# Altium PCB Arduino_SLVN.PcbDoc
Units mm, origin at the board's own origin, x right, y up, seen from the top; angles counter-clockwise.
Board outline 70.5 x 44.25 mm, 2 copper layers (Top Layer, Bottom Layer); 74 components, 54 nets, 207 pads, 45 vias.
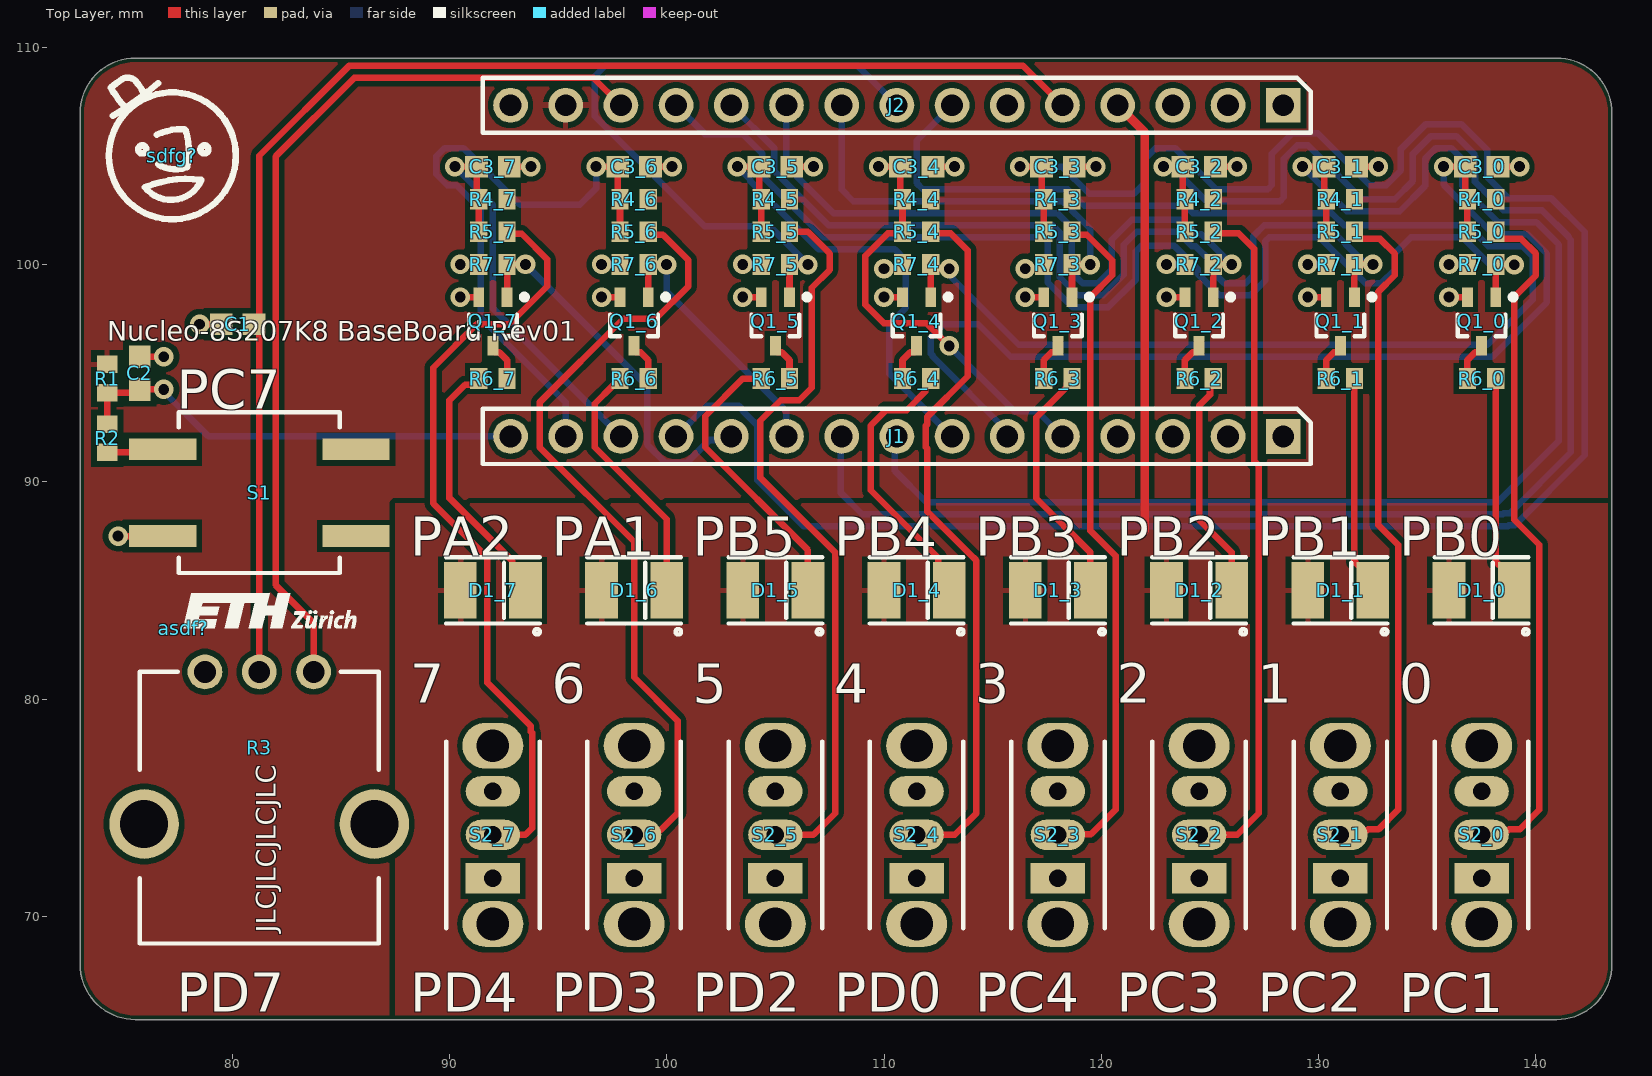
[diagram p0: Top Layer view]
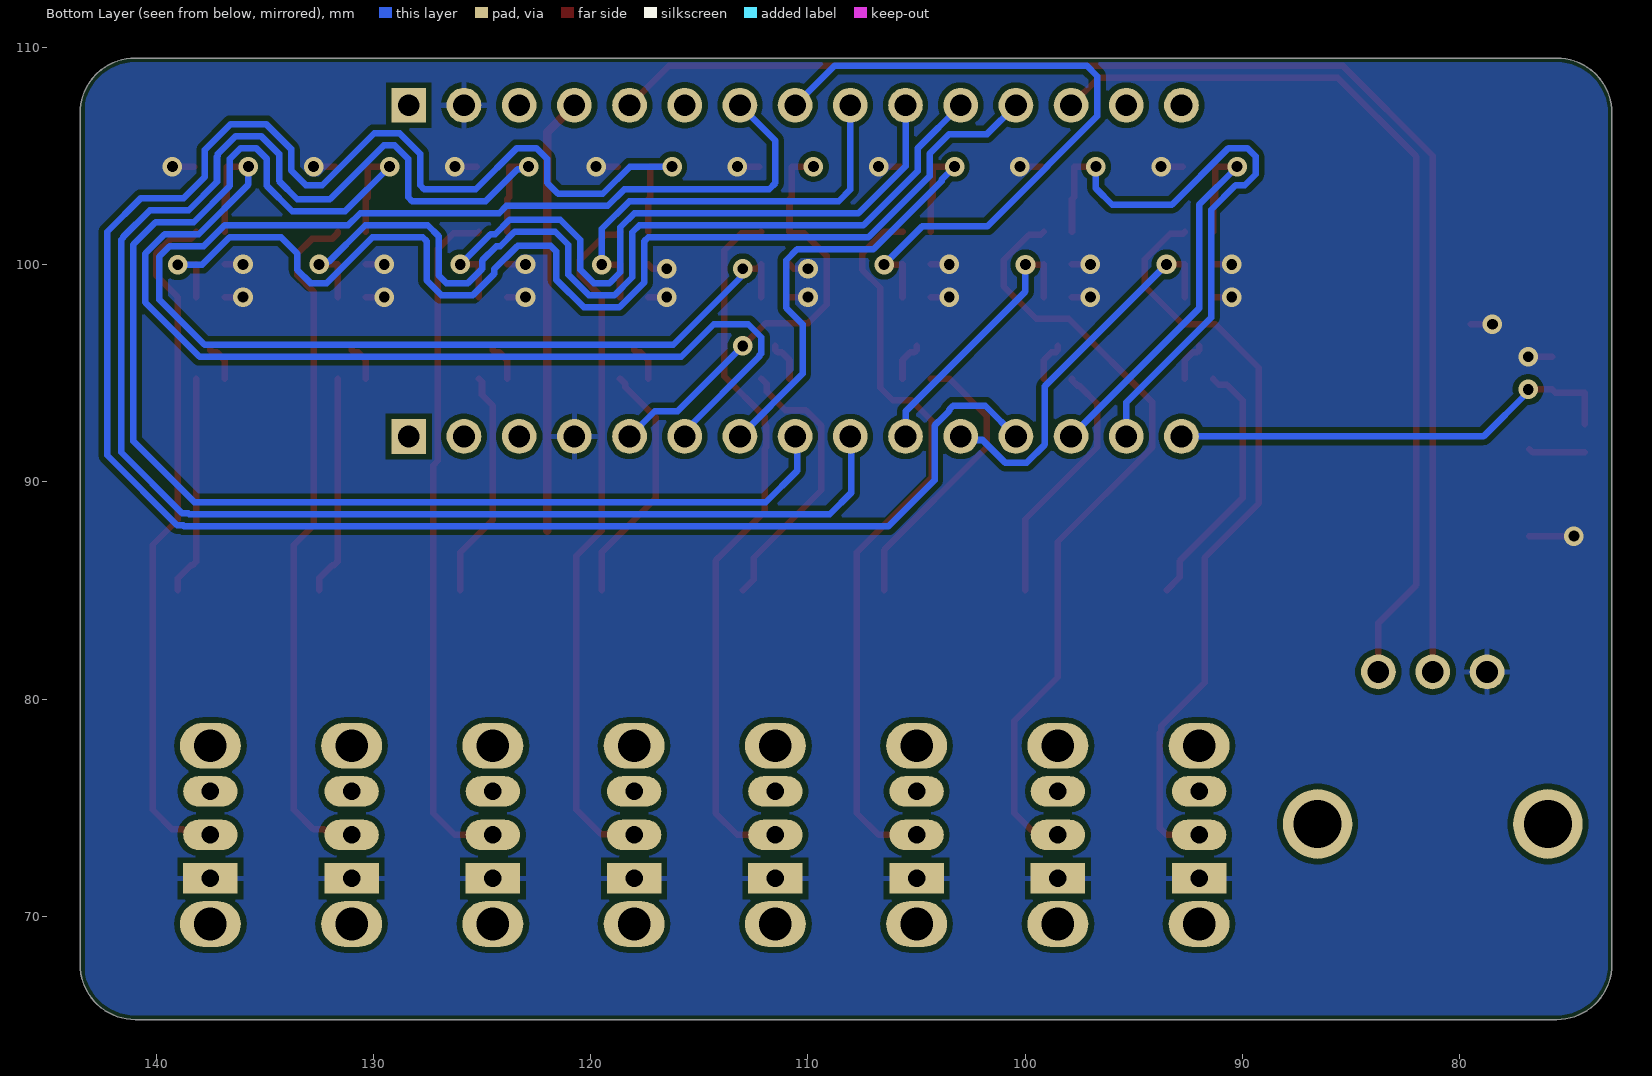
[diagram p1: Bottom Layer view, seen from below]
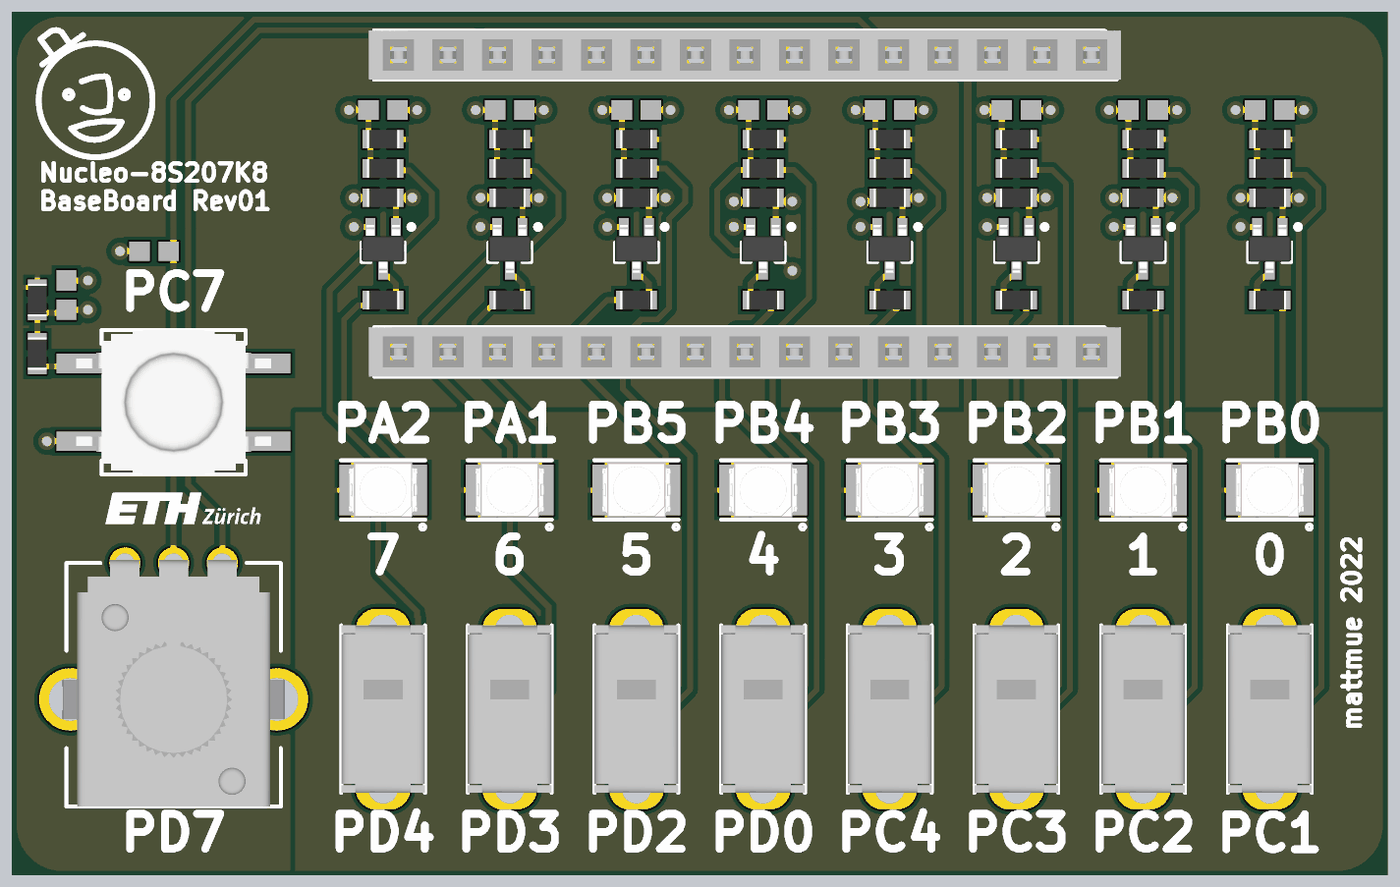
[diagram p2: 3D render of the assembled board from above, using the file's embedded part models]

## Layer stack, top to bottom
Top Solder: solder mask 0.0102, Solder Resist, Dk 3.5
Top Layer: signal copper 0.0356
Dielectric 1: dielectric 0.32, FR-4, Dk 4.8
Bottom Layer: signal copper 0.0356
Bottom Solder: solder mask 0.0102, Solder Resist, Dk 3.5

## Board outline
140.96,109.5 cw(c140.96,106.96) 143.5,106.96 143.5,67.79 cw(c140.96,67.79) 140.96,65.25 75.54,65.25 cw(c75.54,67.79) 73,67.79 73,106.96 cw(c75.54,106.96) 75.54,109.5

## Design rules (kind name [scope] priority, off if disabled: settings)
BoardOutlineClearance [All] p1: gap=0.2 ignorepadtopadclearanceinfootprint=FALSE
Clearance [All] p1: gap=0.254 ignorepadtopadclearanceinfootprint=FALSE except(0: Arc-Hole Track-Hole SMDPad-Hole THPad-Hole Via-Hole Fill-Hole Poly-Hole Region-Hole Text-Hole)
PolygonConnect [All] p1: thpad.connectstyle=Relief thpad.reliefconductorwidth=0.254 thpad.reliefentries=4 thpad.polygonreliefangle="90 Angle" thpad.airgapwidth=0.254 smdpad.connectstyle=Relief smdpad.reliefconductorwidth=0.254 smdpad.reliefentries=4 smdpad.polygonreliefangle="90 Angle" smdpad.airgapwidth=0.254 via.connectstyle=Direct via.reliefconductorwidth=0.254 via.reliefentries=4 via.polygonreliefangle="90 Angle" via.airgapwidth=0.254
RoomDefinition 0 [InComponentClass('0')] p1: confinementstyle=ConfineIn formatcopy=TRUE lockcomponents=FALSE outline 134.25,65.5 140.75,65.5 140.75,105.75 134.25,105.75
RoomDefinition STM8Nucleo_Baseboard [InComponentClass('STM8Nucleo_Baseboard')] p2: confinementstyle=ConfineIn formatcopy=TRUE lockcomponents=FALSE outline 81.675,8.25 110.25,8.25 110.25,19.426 81.675,19.426
RoomDefinition 7 [InComponentClass('7')] p3: confinementstyle=ConfineIn formatcopy=TRUE lockcomponents=FALSE outline 88.75,65.5 95.25,65.5 95.25,105.75 88.75,105.75
RoomDefinition 6 [InComponentClass('6')] p4: confinementstyle=ConfineIn formatcopy=TRUE lockcomponents=FALSE outline 95.25,65.5 101.75,65.5 101.75,105.75 95.25,105.75
RoomDefinition 5 [InComponentClass('5')] p5: confinementstyle=ConfineIn formatcopy=TRUE lockcomponents=FALSE outline 101.75,65.5 108.25,65.5 108.25,105.75 101.75,105.75
RoomDefinition 4 [InComponentClass('4')] p6: confinementstyle=ConfineIn formatcopy=TRUE lockcomponents=FALSE outline 108.25,65.5 114.75,65.5 114.75,105.75 108.25,105.75
RoomDefinition 3 [InComponentClass('3')] p7: confinementstyle=ConfineIn formatcopy=TRUE lockcomponents=FALSE outline 114.75,65.5 121.25,65.5 121.25,105.75 114.75,105.75
RoomDefinition 2 [InComponentClass('2')] p8: confinementstyle=ConfineIn formatcopy=TRUE lockcomponents=FALSE outline 121.25,65.5 127.75,65.5 127.75,105.75 121.25,105.75
RoomDefinition 1 [InComponentClass('1')] p9: confinementstyle=ConfineIn formatcopy=TRUE lockcomponents=FALSE outline 127.75,65.5 134.25,65.5 134.25,105.75 127.75,105.75
RoutingVias [All] p1: holewidth=0.5 width=0.9 viastyle="Through Hole" minholewidth=0.2 minwidth=0.4 maxholewidth=0.711 maxwidth=1.27
SolderMaskExpansion [All] p1: expansion=0.102 istentingtop=FALSE
Width [All] p1: maxlimit=1 minlimit=0.25 preferedwidth=0.3
30 further rules are at their usual default settings.

## Classes and differential pairs
channel class Switch_Led: 0 1 2 3 4 5 6 7
component class STM8Nucleo_Baseboard: asdf? C1 C2 J1 J2 R1 R2 R3 S1 sdfg?
component class 0: C3_0 D1_0 Q1_0 R4_0 R5_0 R6_0 R7_0 S2_0
component class 7: C3_7 D1_7 Q1_7 R4_7 R5_7 R6_7 R7_7 S2_7
component class 6: C3_6 D1_6 Q1_6 R4_6 R5_6 R6_6 R7_6 S2_6
component class 5: C3_5 D1_5 Q1_5 R4_5 R5_5 R6_5 R7_5 S2_5
component class 4: C3_4 D1_4 Q1_4 R4_4 R5_4 R6_4 R7_4 S2_4
component class 3: C3_3 D1_3 Q1_3 R4_3 R5_3 R6_3 R7_3 S2_3
component class 2: C3_2 D1_2 Q1_2 R4_2 R5_2 R6_2 R7_2 S2_2
component class 1: C3_1 D1_1 Q1_1 R4_1 R5_1 R6_1 R7_1 S2_1

## Components (designator, comment, footprint, x,y, rotation, side; value= is the part's Value field where it differs from the comment)
asdf? "ETH-Logo" GRAPH_ETH_LOGO_SMALL 77.75,83.25 r0 top
C1 "C0603" SMD_CAPC1608X08N 80.25,97.25 r0 top value=1n
C2 "C0603" SMD_CAPC1608X08N 75.75,95 r270 top value=1n
C3_0 "C0603" SMD_CAPC1608X08N 137.5,104.5 r180 top value=1n (schematic designator C3)
C3_1 "C0603" SMD_CAPC1608X08N 131,104.5 r180 top value=1n (schematic designator C3)
C3_2 "C0603" SMD_CAPC1608X08N 124.5,104.5 r180 top value=1n (schematic designator C3)
C3_3 "C0603" SMD_CAPC1608X08N 118,104.5 r180 top value=1n (schematic designator C3)
C3_4 "C0603" SMD_CAPC1608X08N 111.5,104.5 r180 top value=1n (schematic designator C3)
C3_5 "C0603" SMD_CAPC1608X08N 105,104.5 r180 top value=1n (schematic designator C3)
C3_6 "C0603" SMD_CAPC1608X08N 98.5,104.5 r180 top value=1n (schematic designator C3)
C3_7 "C0603" SMD_CAPC1608X08N 92,104.5 r180 top value=1n (schematic designator C3)
D1_0 "LST676" 2-PLCC 137.5,85 r90 top (schematic designator D1)
D1_1 "LST676" 2-PLCC 131,85 r90 top (schematic designator D1)
D1_2 "LST676" 2-PLCC 124.5,85 r90 top (schematic designator D1)
D1_3 "LST676" 2-PLCC 118,85 r90 top (schematic designator D1)
D1_4 "LST676" 2-PLCC 111.5,85 r90 top (schematic designator D1)
D1_5 "LST676" 2-PLCC 105,85 r90 top (schematic designator D1)
D1_6 "LST676" 2-PLCC 98.5,85 r90 top (schematic designator D1)
D1_7 "LST676" 2-PLCC 92,85 r90 top (schematic designator D1)
J1 "HEADER_FEMALE" THT_CONN_1x15_FEMALE_2.54 128.371,92.086 r270 top
J2 "HEADER_FEMALE" THT_CONN_1x15_FEMALE_2.54 128.371,107.326 r270 top
Q1_0 "BSS138" "SOT323 SC70" 137.5,97.375 r270 top (schematic designator Q1)
Q1_1 "BSS138" "SOT323 SC70" 131,97.375 r270 top (schematic designator Q1)
Q1_2 "BSS138" "SOT323 SC70" 124.5,97.375 r270 top (schematic designator Q1)
Q1_3 "BSS138" "SOT323 SC70" 118,97.375 r270 top (schematic designator Q1)
Q1_4 "BSS138" "SOT323 SC70" 111.5,97.375 r270 top (schematic designator Q1)
Q1_5 "BSS138" "SOT323 SC70" 105,97.375 r270 top (schematic designator Q1)
Q1_6 "BSS138" "SOT323 SC70" 98.5,97.375 r270 top (schematic designator Q1)
Q1_7 "BSS138" "SOT323 SC70" 92,97.375 r270 top (schematic designator Q1)
R1 "R0603" SMD_RESC1608X05N 74.25,94.75 r90 top value=10K
R2 "R0603" SMD_RESC1608X05N 74.25,92 r270 top value=150R
R3 "PTV09A-4020S-B103" THT_PTV09A-1 81.25,74.25 r180 top value=10K
R4_0 "R0603" SMD_RESC1608X05N 137.5,103 r0 top value=10K (schematic designator R4)
R4_1 "R0603" SMD_RESC1608X05N 131,103 r0 top value=10K (schematic designator R4)
R4_2 "R0603" SMD_RESC1608X05N 124.5,103 r0 top value=10K (schematic designator R4)
R4_3 "R0603" SMD_RESC1608X05N 118,103 r0 top value=10K (schematic designator R4)
R4_4 "R0603" SMD_RESC1608X05N 111.5,103 r0 top value=10K (schematic designator R4)
R4_5 "R0603" SMD_RESC1608X05N 105,103 r0 top value=10K (schematic designator R4)
R4_6 "R0603" SMD_RESC1608X05N 98.5,103 r0 top value=10K (schematic designator R4)
R4_7 "R0603" SMD_RESC1608X05N 92,103 r0 top value=10K (schematic designator R4)
R5_0 "R0603" SMD_RESC1608X05N 137.5,101.5 r0 top value=150R (schematic designator R5)
R5_1 "R0603" SMD_RESC1608X05N 131,101.5 r0 top value=150R (schematic designator R5)
R5_2 "R0603" SMD_RESC1608X05N 124.5,101.5 r0 top value=150R (schematic designator R5)
R5_3 "R0603" SMD_RESC1608X05N 118,101.5 r0 top value=150R (schematic designator R5)
R5_4 "R0603" SMD_RESC1608X05N 111.5,101.5 r0 top value=150R (schematic designator R5)
R5_5 "R0603" SMD_RESC1608X05N 105,101.5 r0 top value=150R (schematic designator R5)
R5_6 "R0603" SMD_RESC1608X05N 98.5,101.5 r0 top value=150R (schematic designator R5)
R5_7 "R0603" SMD_RESC1608X05N 92,101.5 r0 top value=150R (schematic designator R5)
R6_0 "R0603" SMD_RESC1608X05N 137.5,94.75 r0 top value=150R (schematic designator R6)
R6_1 "R0603" SMD_RESC1608X05N 131,94.75 r0 top value=150R (schematic designator R6)
R6_2 "R0603" SMD_RESC1608X05N 124.5,94.75 r0 top value=150R (schematic designator R6)
R6_3 "R0603" SMD_RESC1608X05N 118,94.75 r0 top value=150R (schematic designator R6)
R6_4 "R0603" SMD_RESC1608X05N 111.5,94.75 r0 top value=150R (schematic designator R6)
R6_5 "R0603" SMD_RESC1608X05N 105,94.75 r180 top value=150R (schematic designator R6)
R6_6 "R0603" SMD_RESC1608X05N 98.5,94.75 r180 top value=150R (schematic designator R6)
R6_7 "R0603" SMD_RESC1608X05N 92,94.75 r180 top value=150R (schematic designator R6)
R7_0 "R0603" SMD_RESC1608X05N 137.5,100 r0 top value=10K (schematic designator R7)
R7_1 "R0603" SMD_RESC1608X05N 131,100 r0 top value=10K (schematic designator R7)
R7_2 "R0603" SMD_RESC1608X05N 124.5,100 r0 top value=10K (schematic designator R7)
R7_3 "R0603" SMD_RESC1608X05N 118,100 r0 top value=10K (schematic designator R7)
R7_4 "R0603" SMD_RESC1608X05N 111.5,100 r0 top value=10K (schematic designator R7)
R7_5 "R0603" SMD_RESC1608X05N 105,100 r0 top value=10K (schematic designator R7)
R7_6 "R0603" SMD_RESC1608X05N 98.5,100 r0 top value=10K (schematic designator R7)
R7_7 "R0603" SMD_RESC1608X05N 92,100 r0 top value=10K (schematic designator R7)
S1 "TL6120" SMD_TL6120 81.25,89.5 r0 top
S2_0 "OS102011MS2QN1" THT_SLIDESWITCH_86X43 137.5,73.75 r90 top (schematic designator S2)
S2_1 "OS102011MS2QN1" THT_SLIDESWITCH_86X43 131,73.75 r90 top (schematic designator S2)
S2_2 "OS102011MS2QN1" THT_SLIDESWITCH_86X43 124.5,73.75 r90 top (schematic designator S2)
S2_3 "OS102011MS2QN1" THT_SLIDESWITCH_86X43 118,73.75 r90 top (schematic designator S2)
S2_4 "OS102011MS2QN1" THT_SLIDESWITCH_86X43 111.5,73.75 r90 top (schematic designator S2)
S2_5 "OS102011MS2QN1" THT_SLIDESWITCH_86X43 105,73.75 r90 top (schematic designator S2)
S2_6 "OS102011MS2QN1" THT_SLIDESWITCH_86X43 98.5,73.75 r90 top (schematic designator S2)
S2_7 "OS102011MS2QN1" THT_SLIDESWITCH_86X43 92,73.75 r90 top (schematic designator S2)
sdfg? "Mattmue-Logo" GRAPH_MATTMUE_6MM 77.25,105 r0 top

## Footprints (in the part's own frame and the unit in brackets; to place one, negate y for a bottom-side part, rotate by r counter-clockwise, add the part's x,y. Pads: shape width x height; smd on the part's side, far side on the other; paste and mask are expansions set on the pad)
2-PLCC [mm] "2-PLCC, SMD, 3x5x2.1"
  rect 2.6x1.5 smd: 1(0,1.5) 2(0,-1.5)
  silkscreen extent -2.03,-2.16 1.52,2.16, body extent -1.4,-1.75 1.4,1.75, height 1.65
GRAPH_ETH_LOGO_SMALL [mm] "Small Logo of ETH"
  silkscreen extent 0,0 7.97,1.62
GRAPH_MATTMUE_6MM [mm] "Logo of mattmue"
  silkscreen extent -2.92,-2.92 2.92,3.6
SMD_CAPC1608X08N [mm] "Chip Capacitor, 2-Leads, Body 1.60x0.80mm, 0603, IPC Medium Density"
  rect 1.05x1 smd: 1(-0.75,0) 2(0.75,0)
  body extent -0.88,-0.48 0.87,0.47, height 0.85
SMD_RESC1608X05N [mm] "Chip Resistor, 2-Leads, Body 1.58x0.85mm, 0603, IPC Medium Density"
  rect 0.8x0.95 smd: 1(-0.65,0) 2(0.65,0)
  body extent -0.82,-0.48 0.82,0.48, height 0.5
SMD_TL6120 [mm] "Pushbutton, 4P, 7.4x7.4x6.9mm"
  rect 3.1x1 smd: 1(-4.45,-2) 2(-4.45,2) 3(4.45,2) 4(4.45,-2)
  silkscreen extent -3.7,-3.7 3.7,3.7, body extent -5,-3.7 5,3.7, height 6.95
"SOT323 SC70" [mm] "SOT323 SC70, 3-Leads, Body 2.00x2.23mm, Pitch 0.65mm, IPC Medium Density"
  rect 0.9x0.5 smd: 1(-1.125,0.65) 2(-1.125,-0.65) 3(1.125,0)
  silkscreen extent -1.25,-1.1 0.67,1.58, body extent -1.22,-1.1 1.22,1.1, height 1.1
THT_CONN_1x15_FEMALE_2.54 [mm] "Connector, THT, Female Header, 2x15 poles, 2.54mm pitch"
  rect 1.6x1.6 hole 1: 1(0,0)
  round 1.6 hole 1: 2(0,-2.54) 3(0,-5.08) 4(0,-7.62) 5(0,-10.16) 6(0,-12.7) 7(0,-15.24) 8(0,-17.78) 9(0,-20.32) 10(0,-22.86) 11(0,-25.4) 12(0,-27.94) 13(0,-30.48) 14(0,-33.02) 15(0,-35.56)
  silkscreen extent -1.27,-36.83 1.27,1.27, body extent -1.27,-37.1 1.27,1.5, height 8.5
THT_PTV09A-1 [mm] "THT, Potentiometer, 3 Leads Straight, 9.7x11x25mm"
  round 1.6 hole 1: 1(-2.5,-7) 2(2.5,-7) 3(0,-7)
  round 3.2 hole 2.2: NC1(-5.3,0) NC2(5.3,0)
  silkscreen extent -5.5,-7 5.5,5.5, body extent -5.7,-7.15 5.7,5.5, height 20
THT_SLIDESWITCH_86X43 [mm] "Slideswitch OS, THT, Straight, 8.6x4.3x8.7"
  rect 1.4x2.5 hole 0.8: 1(-2,0)
  oval 1.4x2.5 hole 0.8: 2(0,0) 3(2,0)
  oval 2.1x2.8 hole 1.5: NC1(-4.1,0) NC2(4.1,0)
  silkscreen extent -4.3,-2.15 4.3,2.15, body extent -4.3,-2.15 4.3,2.15, height 8.7

## Part data
asdf?: library part CMPL-001-0407-A.3, "GRAPH ETH"
C1 C2 C3_0 C3_1 C3_2 C3_3 C3_4 C3_5 C3_6 C3_7: library part CMP-02314-1, "CERCAP 1n 100V 1% NP0/C0G 0603", MANUFACTURER=KEMET, Manufacturer Part Number=C0603C102F1GAC7867, Supplier Part Number=399-17967-1-ND, Supplier=Digi-Key
D1_0 D1_1 D1_2 D1_3 D1_4 D1_5 D1_6 D1_7: library part CMP-01594-1, "LED RED 30mA 2V 3x3.4mm", MANUFACTURER="OSRAM Opto Semiconductors Inc.", Manufacturer Part Number="LS T676-R1S1-1-Z", Supplier Part Number=475-2683-1-ND, Supplier=Digi-Key
J1 J2: library part CMP-01593-2, "CONN Female 1x15 2.54mm Straight THT 2.54x38.6mm", MANUFACTURER="Sullins Connector Solutions", Manufacturer Part Number=PPPC151LFBN-RC, Supplier Part Number=S7048-ND, Supplier=Digi-Key
Q1_0 Q1_1 Q1_2 Q1_3 Q1_4 Q1_5 Q1_6 Q1_7: library part CMP-01592-1, "MOSFET N 0.2A 50V SOT323", MANUFACTURER="Diodes Incorporated", Manufacturer2="Micro Commercial Co", Manufacturer2 Part Number=BSS138W-TP, Manufacturer Part Number=BSS138W-7-F, Supplier2 Part Number=BSS138W-TPMSCT-ND, Supplier Part Number=BSS138W-FDICT-ND, Supplier=Digi-Key, Supplier2=Digi-Key
R1 R4_0 R4_1 R4_2 R4_3 R4_4 R4_5 R4_6 R4_7 R7_0 R7_1 R7_2 R7_3 R7_4 R7_5 R7_6 R7_7: library part CMPL-001-0158-A.2, "RES 10K 100mW 1% 0603", MANUFACTURER=YAEGO, Manufacturer2="Vishay Dale", Manufacturer2 Part Number=CRCW060310K0FKEA, Manufacturer Part Number=RC0603FR-0710KL, Supplier2 Part Number=541-10.0KHCT-ND, Supplier Part Number=311-10.0KHRCT-ND, Supplier=Digi-Key, Supplier2=Digi-Key
R2 R5_0 R5_1 R5_2 R5_3 R5_4 R5_5 R5_6 R5_7 R6_0 R6_1 R6_2 R6_3 R6_4 R6_5 R6_6 R6_7: library part CMPL-001-0114-A.2, "RES 150R 100mW 1% 0603", MANUFACTURER=YAEGO, Manufacturer2="Vishay Dale", Manufacturer2 Part Number=CRCW0603150RFKEA, Manufacturer Part Number=RC0603FR-07150RL, Supplier2 Part Number=541-150HCT-ND, Supplier Part Number=311-150HRCT-ND, Supplier=Digi-Key, Supplier2=Digi-Key
R3: library part CMPL-001-0007-A.2, "POTENTIOMETER 10K 50mW 20% 11x9.7mm", MANUFACTURER="Bourns Inc.", Supplier Part Number=PTV09A-4020S-B103-ND, Manufacturer Part Number=PTV09A-4020S-B103, Note=Straight, Supplier=Digi-Key
S1: library part CMP-01596-1, "BUTTON SPST 12V 0.05A 7.4x7.4mm", MANUFACTURER=E-Switch, Manufacturer Part Number=TL6120CF300QG, Supplier Part Number=EG4355CT-ND, Supplier=Digi-Key
S2_0 S2_1 S2_2 S2_3 S2_4 S2_5 S2_6 S2_7: library part CMPL-001-0005-2, "SWITCH SPDT 12V 0.1A 4.3x8.6mm", MANUFACTURER=C&K, Supplier Part Number=CKN9565-ND, Manufacturer Part Number=OS102011MS2QN1, Supplier=Digi-Key
sdfg?: library part CMPL-001-0415-A.3, "GRAPH MATTMUE"

## Via types
v1: diameter 0.9, hole 0.5, Top Layer to Bottom Layer, tented both sides, 45 vias

## Nets (pads, with @x,y where several pads share a name; then routed paths per layer and width w, separated by ;. In a path a pad name is that pad's centre, name@x,y a point inside that pad or via, vN(x,y) a via of type N, cw(c..) or ccw(c..) an arc to the next point about the centre after c; other vN are vias at no path point)
3V3: J2.14 R1.2 R4_0.2 R4_1.2 R4_2.2 R4_3.2 R4_4.2 R4_5.2 R4_6.2 R4_7.2
5V: D1_0.1 D1_1.1 D1_2.1 D1_3.1 D1_4.1 D1_5.1 D1_6.1 D1_7.1 J2.4 | length 20.1
  Top Layer w0.4: J2.4 122,106.078 122,87.75
AREF: J2.13 R3.1 | length 42.4
  Top Layer w0.3: R3.1 83.75,83.5 82,85.25 82,104.967 85.629,108.596 96.622,108.596 J2.13
GND: C1.1 C2.1 C3_0.1 C3_1.1 C3_2.1 C3_3.1 C3_4.1 C3_5.1 C3_6.1 C3_7.1 J1.4 J2.2 Q1_0.2 Q1_1.2 Q1_2.2 Q1_3.2 Q1_4.2 Q1_5.2 Q1_6.2 Q1_7.2 R3.2 R7_0.1 R7_1.1 R7_2.1 R7_3.1 R7_4.1 R7_5.1 R7_6.1 R7_7.1 S1.1 S2_0.1 S2_1.1 S2_2.1 S2_3.1 S2_4.1 S2_5.1 S2_6.1 S2_7.1 | length 25.9
  Top Layer w0.3: v1(74.75,87.5) S1.1 ; C2.1 v1(76.854,95.75) ; v1(78.5,97.25) C1.1 ; v1(90.5,98.5) Q1_7.2 ; v1(90.5,100) R7_7.1 ; C3_7.1 v1(93.75,104.5) ; v1(97,98.5) Q1_6.2 ; v1(97,100) R7_6.1 ; C3_6.1 v1(100.25,104.5) ; v1(103.5,98.5) Q1_5.2 ; v1(103.5,100) R7_5.1 ; C3_5.1 v1(106.75,104.5) ; v1(110,98.5) Q1_4.2 ; v1(110,99.802) 110.652,99.802 R7_4.1 ; C3_4.1 v1(113.25,104.5) ; v1(116.5,98.5) Q1_3.2 ; v1(116.5,99.802) 117.152,99.802 R7_3.1 ; C3_3.1 v1(119.75,104.5) ; v1(123,98.5) Q1_2.2 ; v1(123,100) R7_2.1 ; C3_2.1 v1(126.25,104.5) ; v1(129.5,98.5) Q1_1.2 ; v1(129.5,100) R7_1.1 ; C3_1.1 v1(132.75,104.5) ; v1(136,98.5) Q1_0.2 ; v1(136,100) R7_0.1 ; C3_0.1 v1(139.25,104.5)
NetD1_0_2: D1_0.2 R6_0.2 | length 10.1
  Top Layer w0.3: R6_0.2 138.15,86.326 138.326,86.15 138.4,86.15 139,85.55 D1_0.2
NetD1_1_2: D1_1.2 R6_1.2 | length 10.1
  Top Layer w0.3: R6_1.2 131.65,86.326 131.826,86.15 131.9,86.15 132.5,85.55 D1_1.2
NetD1_2_2: D1_2.2 R6_2.2 | length 10.6
  Top Layer w0.3: R6_2.2 125.001,94.601 125.001,94.001 124.5,93.5 124.5,88.25 126,86.75 D1_2.2
NetD1_3_2: D1_3.2 R6_3.2 | length 11.5
  Top Layer w0.3: R6_3.2 118.4,94.5 118.4,94.354 117.007,92.961 117.007,89.243 119.5,86.75 D1_3.2
NetD1_4_2: D1_4.2 R6_4.2 | length 12.9
  Top Layer w0.3: R6_4.2 111.9,94.5 111.9,94.15 111.04,93.29 110.093,93.29 109.387,92.585 109.387,89.613 112.5,86.5 112.5,85.5 D1_4.2
NetD1_5_2: D1_5.2 R6_5.2 | length 13.3
  Top Layer w0.3: R6_5.2 103.5,94.75 101.767,93.017 101.767,91.588 106.5,86.855 D1_5.2
NetD1_6_2: D1_6.2 R6_6.2 | length 11.6
  Top Layer w0.3: R6_6.2 97.85,94.675 97.6,94.425 97.525,94.425 96.687,93.587 96.687,91.588 100,88.275 D1_6.2
NetD1_7_2: D1_7.2 R6_7.2 | length 12
  Top Layer w0.3: R6_7.2 91.35,94.719 91.1,94.469 90.719,94.469 90,93.75 90,89.25 92.9,86.35 92.9,85.6 D1_7.2
NetQ1_0_3: Q1_0.3 R6_0.1 | length 1.9
  Top Layer w0.3: R6_0.1 136.85,95.6 137.2,95.95 137.4,95.95 137.5,96.05 Q1_0.3
NetQ1_1_3: Q1_1.3 R6_1.1 | length 1.9
  Top Layer w0.3: R6_1.1 130.35,95.6 130.7,95.95 130.9,95.95 131,96.05 Q1_1.3
NetQ1_2_3: Q1_2.3 R6_2.1 | length 1.9
  Top Layer w0.3: R6_2.1 123.85,95.6 124.2,95.95 124.4,95.95 124.5,96.05 Q1_2.3
NetQ1_3_3: Q1_3.3 R6_3.1 | length 1.9
  Top Layer w0.3: R6_3.1 117.35,95.6 117.7,95.95 117.9,95.95 118,96.05 Q1_3.3
NetQ1_4_3: Q1_4.3 R6_4.1 | length 1.9
  Top Layer w0.3: R6_4.1 110.85,95.6 111.2,95.95 111.4,95.95 111.5,96.05 Q1_4.3
NetQ1_5_3: Q1_5.3 R6_5.1 | length 1.9
  Top Layer w0.3: Q1_5.3 105,96.05 105.1,95.95 105.3,95.95 105.65,95.6 R6_5.1
NetQ1_6_3: Q1_6.3 R6_6.1 | length 1.9
  Top Layer w0.3: Q1_6.3 98.5,96.05 98.6,95.95 98.8,95.95 99.15,95.6 R6_6.1
NetQ1_7_3: Q1_7.3 R6_7.1 | length 1.9
  Top Layer w0.3: Q1_7.3 92,96.05 92.1,95.95 92.3,95.95 92.65,95.6 R6_7.1
NetR2_2: R2.2 S1.2 | length 2.6
  Top Layer w0.3: R2.2 76.65,91.35 S1.2
NetR5_0_2: R5_0.2 S2_0.2 | length 31.9
  Top Layer w0.3: S2_0.2 137.71,73.96 138.736,73.96 138.776,74 139.25,74 140.154,74.904 140.154,87.096 139,88.25 139,98.5 140,99.5 140,100.5 139.325,101.175 138.4,101.175 138.15,101.425 R5_0.2
NetR5_1_2: R5_1.2 S2_1.2 | length 31.7
  Top Layer w0.3: S2_1.2 131.21,73.96 132.236,73.96 132.276,74 132.75,74 133.654,74.904 133.654,87.096 132.75,88 132.75,98.75 133.5,99.5 133.5,100.5 132.825,101.175 131.9,101.175 131.65,101.425 R5_1.2
NetR5_2_2: R5_2.2 S2_2.2 | length 31.4
  Top Layer w0.3: S2_2.2 126.25,73.75 127.25,74.75 127.25,90.75 127.035,90.965 127.035,100.715 126.325,101.425 125.225,101.425 R5_2.2
NetR5_3_2: R5_3.2 S2_3.2 | length 31.7
  Top Layer w0.3: S2_3.2 118.024,73.774 119.524,73.774 120.654,74.904 120.654,86.596 119.5,87.75 119.5,98.5 120.5,99.5 120.5,100.188 119.324,101.364 118.786,101.364 R5_3.2
NetR5_4_2: R5_4.2 S2_4.2 | length 32.9
  Top Layer w0.3: S2_4.2 113.25,73.75 114.25,74.75 114.25,86.371 113.917,86.704 112,88.621 112,91.515 111.927,91.588 111.927,92.585 112,92.658 112,93 113.854,94.854 113.854,100.646 113.075,101.425 112.225,101.425 R5_4.2
NetR5_5_2: R5_5.2 S2_5.2 | length 34.4
  Top Layer w0.3: S2_5.2 106.75,73.75 107.75,74.75 107.75,86.75 104.307,90.193 104.307,92.807 105.25,93.75 106.096,93.75 106.673,94.327 106.673,98.923 107.5,99.75 107.5,100.5 106.5,101.5 R5_5.2
NetR5_6_2: R5_6.2 S2_6.2 | length 36.6
  Top Layer w0.3: S2_6.2 98.71,73.96 99.71,73.96 100.5,74.75 100.5,79 98.5,81 98.5,87.235 94.147,91.588 94.147,93.647 98,97.5 99.5,97.5 101,99 101,100.188 99.824,101.364 99.286,101.364 R5_6.2
NetR5_7_2: R5_7.2 S2_7.2 | length 35.4
  Top Layer w0.3: S2_7.2 93.5,73.75 93.804,74.054 93.804,78.452 93.75,78.506 93.75,78.75 91.75,80.75 91.75,86.5 89.25,89 89.25,95.25 91.25,97.25 92.75,97.25 94.5,99 94.5,100.233 93.324,101.408 92.742,101.408 R5_7.2
PA1: J1.10 Q1_6.1 R7_6.2 | length 12.5
  Top Layer w0.3: Q1_6.1 R7_6.2 99.16,99.99 v1(99.99,99.99)
  Bottom Layer w0.3: v1(99.99,99.99) 99.99,98.76 105.511,93.239 J1.10
PA2: J1.11 Q1_7.1 R7_7.2 | length 17.7
  Top Layer w0.3: Q1_7.1 R7_7.2 v1(93.5,100)
  Bottom Layer w0.3: v1(93.5,100) 99.095,94.405 99.095,91.72 99.933,90.882 100.93,90.882 101.969,91.921 102.806,91.921 J1.11
PB0: J2.12 Q1_0.1 R7_0.2 | length 54.4
  Top Layer w0.3: Q1_0.1 R7_0.2 138.166,99.984 v1(139,99.984)
  Bottom Layer w0.3: J2.12 101.758,106 103.5,106 104.403,105.097 104.403,104.063 107.217,101.25 117.352,101.25 117.528,101.074 117.528,99.178 118.678,98.028 120.312,98.028 121.591,99.308 121.591,100.608 121.837,100.854 123.354,100.854 123.424,100.784 123.436,100.784 124.446,99.774 124.446,99.563 125.417,98.592 126.875,98.592 127.554,99.271 127.554,101.074 127.73,101.25 130.042,101.25 132.146,99.146 132.896,99.146 133.5,99.75 133.5,100.5 134.25,101.25 136.616,101.25 137.882,99.984 v1(139,99.984)
PB1: J2.11 Q1_1.1 R7_1.2 | length 43.4
  Top Layer w0.3: Q1_1.1 R7_1.2 v1(132.5,100)
  Bottom Layer w0.3: J2.11 104.957,105.34 104.957,104.293 107.446,101.804 117.758,101.804 118.082,101.479 118.082,99.407 118.907,98.582 120.082,98.582 121.037,99.537 121.037,100.908 121.63,101.5 122.5,101.5 122.501,101.501 123.502,101.501 124.164,100.84 124.338,100.84 125,100.178 125,99.792 125.646,99.146 126.646,99.146 127,99.5 127,101.083 127,101.304 127.5,101.804 130.379,101.804 132.068,100.115 132.385,100.115 v1(132.5,100)
PB2: J2.10 Q1_2.1 R7_2.2 | length 32
  Top Layer w0.3: Q1_2.1 R7_2.2 v1(126,100)
  Bottom Layer w0.3: J2.10 105.511,104.522 107.675,102.358 116.925,102.358 117.987,102.358 118.636,101.709 118.636,100.647 118.636,99.636 119.136,99.136 119.853,99.136 120.483,99.767 120.483,101.137 121.401,102.055 123.732,102.055 124.393,101.394 124.606,101.394 v1(126,100)
PB3: J2.9 Q1_3.1 R7_3.2 | length 20.1
  Top Layer w0.3: Q1_3.1 R7_3.2 118.66,99.99 v1(119.49,99.99)
  Bottom Layer w0.3: J2.9 108.051,103.449 108.588,102.912 118.217,102.912 119.49,101.638 v1(119.49,99.99)
PB4: J2.7 Q1_4.1 R7_4.2 | length 67.8
  Top Layer w0.3: Q1_4.1 R7_4.2 112.348,99.802 v1(113,99.802)
  Bottom Layer w0.3: v1(113,99.802) 113.115,99.687 113.115,99.385 116.196,96.304 137.771,96.304 139.854,98.387 139.854,100.363 139.379,100.838 137.812,100.838 136.846,101.804 131.163,101.804 130.609,102.358 124.213,102.358 123.875,102.696 119.216,102.696 118.446,103.466 111.784,103.466 111.5,103.75 111.5,105.695 J2.7
PB5: J2.8 Q1_5.1 R7_5.2 | length 31.7
  Top Layer w0.3: Q1_5.1 R7_5.2 105.654,99.996 v1(106.497,99.996)
  Bottom Layer w0.3: v1(106.497,99.996) 106.497,100.003 104.75,101.75 101.75,101.75 99,104.5 99,104.515 96.687,106.828 96.687,108.662 97.176,109.15 108.768,109.15 J2.8
PC1: C3_0.2 J1.6 R4_0.1 R5_0.1 | length 49.5
  Top Layer w0.3: v1(135.75,104.5) C3_0.2 136.75,103.1 R4_0.1 R5_0.1
  Bottom Layer w0.3: J1.6 115.671,92.329 112.25,95.75 112.25,95.792 112.146,95.896 112.146,96.646 112.75,97.25 114.333,97.25 115.833,95.75 138,95.75 140.5,98.25 140.5,100.5 139.608,101.392 138.041,101.392 135.75,103.683 v1(135.75,104.5)
PC2: C3_1.2 J1.8 R4_1.1 R5_1.1 | length 64.2
  Top Layer w0.3: v1(129.25,104.5) C3_1.2 130.25,103.1 R4_1.1 R5_1.1
  Bottom Layer w0.3: J1.8 110.5,91.995 110.5,90.5 111.946,89.054 138.237,89.054 141.054,91.871 141.054,100.913 140.021,101.946 138.271,101.946 136.604,103.613 136.604,104.854 136.104,105.354 135.396,105.354 134.896,104.854 134.896,104.646 134.896,103.613 133.729,102.446 132.696,102.446 131.304,102.446 v1(129.25,104.5)
PC3: C3_2.2 J1.9 R4_2.1 R5_2.1 | length 78.7
  Top Layer w0.3: v1(122.854,104.5) C3_2.2 123.75,103.1 R4_2.1 R5_2.1
  Bottom Layer w0.3: J1.9 108,92.035 108,89.5 109,88.5 138.467,88.5 138.521,88.554 138.804,88.554 141.608,91.358 141.608,101.142 141.5,101.25 141.5,101.283 140.283,102.5 138.5,102.5 137.196,103.804 137.196,104.966 137.158,105.004 137.158,105.083 136.333,105.908 135.167,105.908 134.342,105.083 134.342,103.842 133.5,103 132,103 129.516,105.484 129.026,105.484 128.396,104.854 128.396,103.088 128.22,102.912 124.838,102.912 123.365,104.385 122.969,104.385 v1(122.854,104.5)
PC4: C3_3.2 J1.12 R4_3.1 R5_3.1 | length 98.1
  Top Layer w0.3: v1(116.25,104.5) C3_3.2 117.25,103.1 R4_3.1 R5_3.1
  Bottom Layer w0.3: J1.12 101.845,93.5 103.324,93.5 103.5,93.324 103.5,93.26 103.755,93.005 104.175,92.585 104.175,90.075 106.304,87.946 138.696,87.946 138.75,88 139.033,88 142.25,91.217 142.25,101.5 140.696,103.054 138.729,103.054 137.75,104.033 137.75,105.275 136.563,106.462 134.937,106.462 133.788,105.313 133.788,104.33 133.104,103.646 132.354,103.646 129.962,106.038 128.797,106.038 127.842,105.083 127.842,103.642 127.666,103.466 125.284,103.466 123.396,105.354 122.5,105.354 122,104.854 122,103.75 121.5,103.25 119.446,103.25 118.196,104.5 v1(116.25,104.5)
PC5: J2.15
PC7: C2.2 J1.15 R1.1 R2.1 | length 21
  Top Layer w0.3: R2.1 R1.1 75.6,94.1 C2.2 v1(76.854,94.25)
  Bottom Layer w0.3: v1(76.854,94.25) 76.854,94.146 78.914,92.086 J1.15
PD0: C3_4.2 J1.5 R4_4.1 R5_4.1 | length 20.3
  Top Layer w0.3: v1(109.75,104.5) C3_4.2 110.75,103.1 R4_4.1 R5_4.1 110.776,101.426 110.176,101.426 109.146,100.396 109.146,98.146 109.996,97.296 111.954,97.296 v1(113,96.25)
  Bottom Layer w0.3: v1(113,96.25) 116,93.25 117.048,93.25 J1.5 J1.5@118.046,91.921
PD2: C3_5.2 J1.7 R4_5.1 R5_5.1 | length 23.2
  Top Layer w0.3: v1(103.25,104.5) C3_5.2 104.25,103.1 R4_5.1 R5_5.1
  Bottom Layer w0.3: v1(103.25,104.5) 103.849,103.901 103.849,103.834 106.987,100.696 110.5,100.696 111,100.196 111,98 110.25,97.25 110.25,94.968 J1.7
PD3: C3_6.2 J1.14 R4_6.1 R5_6.1 | length 29.5
  Top Layer w0.3: v1(96.75,104.5) C3_6.2 97.75,103.1 R4_6.1 R5_6.1
  Bottom Layer w0.3: J1.14 95.351,93.649 91.446,97.554 91.446,102.521 90.321,103.646 89.896,103.646 89.396,104.146 89.396,104.97 89.78,105.354 90.646,105.354 93.25,102.75 96,102.75 96.75,103.5 v1(96.75,104.5)
PD4: C3_7.2 J1.13 R4_7.1 R5_7.1 | length 19.6
  Top Layer w0.3: v1(90.25,104.5) C3_7.2 91.25,103.1 R4_7.1 R5_7.1
  Bottom Layer w0.3: v1(90.25,104.5) 92,102.75 92,97.978 J1.13
PD7: C1.2 J2.5 R3.3 | length 63.2
  Top Layer w0.3: R3.3 81.25,83.5 81.25,105 85.4,109.15 116.388,109.15 J2.5
PF4: J2.6
T_NRST1: J1.3
T_NRST2: J2.3
T_VCP_RX: J1.2
T_VCP_TX: J1.1
VIN: J2.1
pads on no net: R3.NC1 R3.NC2 S1.3 S1.4 S2_0.3 S2_0.NC1 S2_0.NC2 S2_1.3 S2_1.NC1 S2_1.NC2 S2_2.3 S2_2.NC1 S2_2.NC2 S2_3.3 S2_3.NC1 S2_3.NC2 S2_4.3 S2_4.NC1 S2_4.NC2 S2_5.3 S2_5.NC1 S2_5.NC2 S2_6.3 S2_6.NC1 S2_6.NC2 S2_7.3 S2_7.NC1 S2_7.NC2

## Polygon pours and split planes (outlines as drawn)
3V3 on Top Layer "3V3_L01_P001" (solid, pour order 1): 73,109.5 143.5,109.5 143.5,65.25 73,65.25
5V on Top Layer "5V_L01_P000" (solid, pour order 0): 143.5,65.25 143.5,89 87.5,89 87.5,65.25
GND on Bottom Layer "GND_L02_P002" (solid, pour order 2): 73,109.5 143.25,109.5 143.25,65.25 73,65.25

## Silkscreen, mask and mechanical layers (free items; w line width, h text height)
Top Overlay:
  text "Nucleo-8S207K8 BaseBoard Rev01" at 74.25,96.5 h0.9
  text "PC7" at 77.451,93.35 h1.8
  text "PA2" at 88.201,86.6 h1.8
  text "PA1" at 94.701,86.6 h1.8
  text "PB5" at 101.201,86.6 h1.8
  text "PB4" at 107.701,86.6 h1.8
  text "PB3" at 114.201,86.6 h1.8
  text "PB2" at 120.701,86.6 h1.8
  text "PB1" at 127.201,86.6 h1.8
  text "PB0" at 133.701,86.6 h1.8
  text "7" at 88.201,79.826 h1.8
  text "6" at 94.701,79.826 h1.8
  text "5" at 101.201,79.826 h1.8
  text "4" at 107.701,79.826 h1.8
  text "3" at 114.201,79.826 h1.8
  text "2" at 120.701,79.826 h1.8
  text "1" at 127.201,79.826 h1.8
  text "0" at 133.701,79.826 h1.8
  text "JLCJLCJLCJLC" at 82,69.25 h0.9 r90
  text "PD7" at 77.451,65.6 h1.8
  text "PD4" at 88.201,65.6 h1.8
  text "PD3" at 94.701,65.6 h1.8
  text "PD2" at 101.201,65.6 h1.8
  text "PD0" at 107.701,65.6 h1.8
  text "PC4" at 114.201,65.6 h1.8
  text "PC3" at 120.701,65.6 h1.8
  text "PC2" at 127.201,65.6 h1.8
  text "PC1" at 133.701,65.576 h1.8
  text "mattmue 2022" at 142.75,42.75 h0.9 r90
Board Shape:
  the board outline again, w0.1